# Altium PCB PCB_Menu-display_2021-06-02.pcbdoc
Units mm, origin at the board's own origin, x right, y up, seen from the top; angles counter-clockwise.
Board outline 86.99 x 83.19 mm, 2 copper layers (Top Layer, Bottom Layer); 16 components, 10 nets, 73 pads, 18 vias.
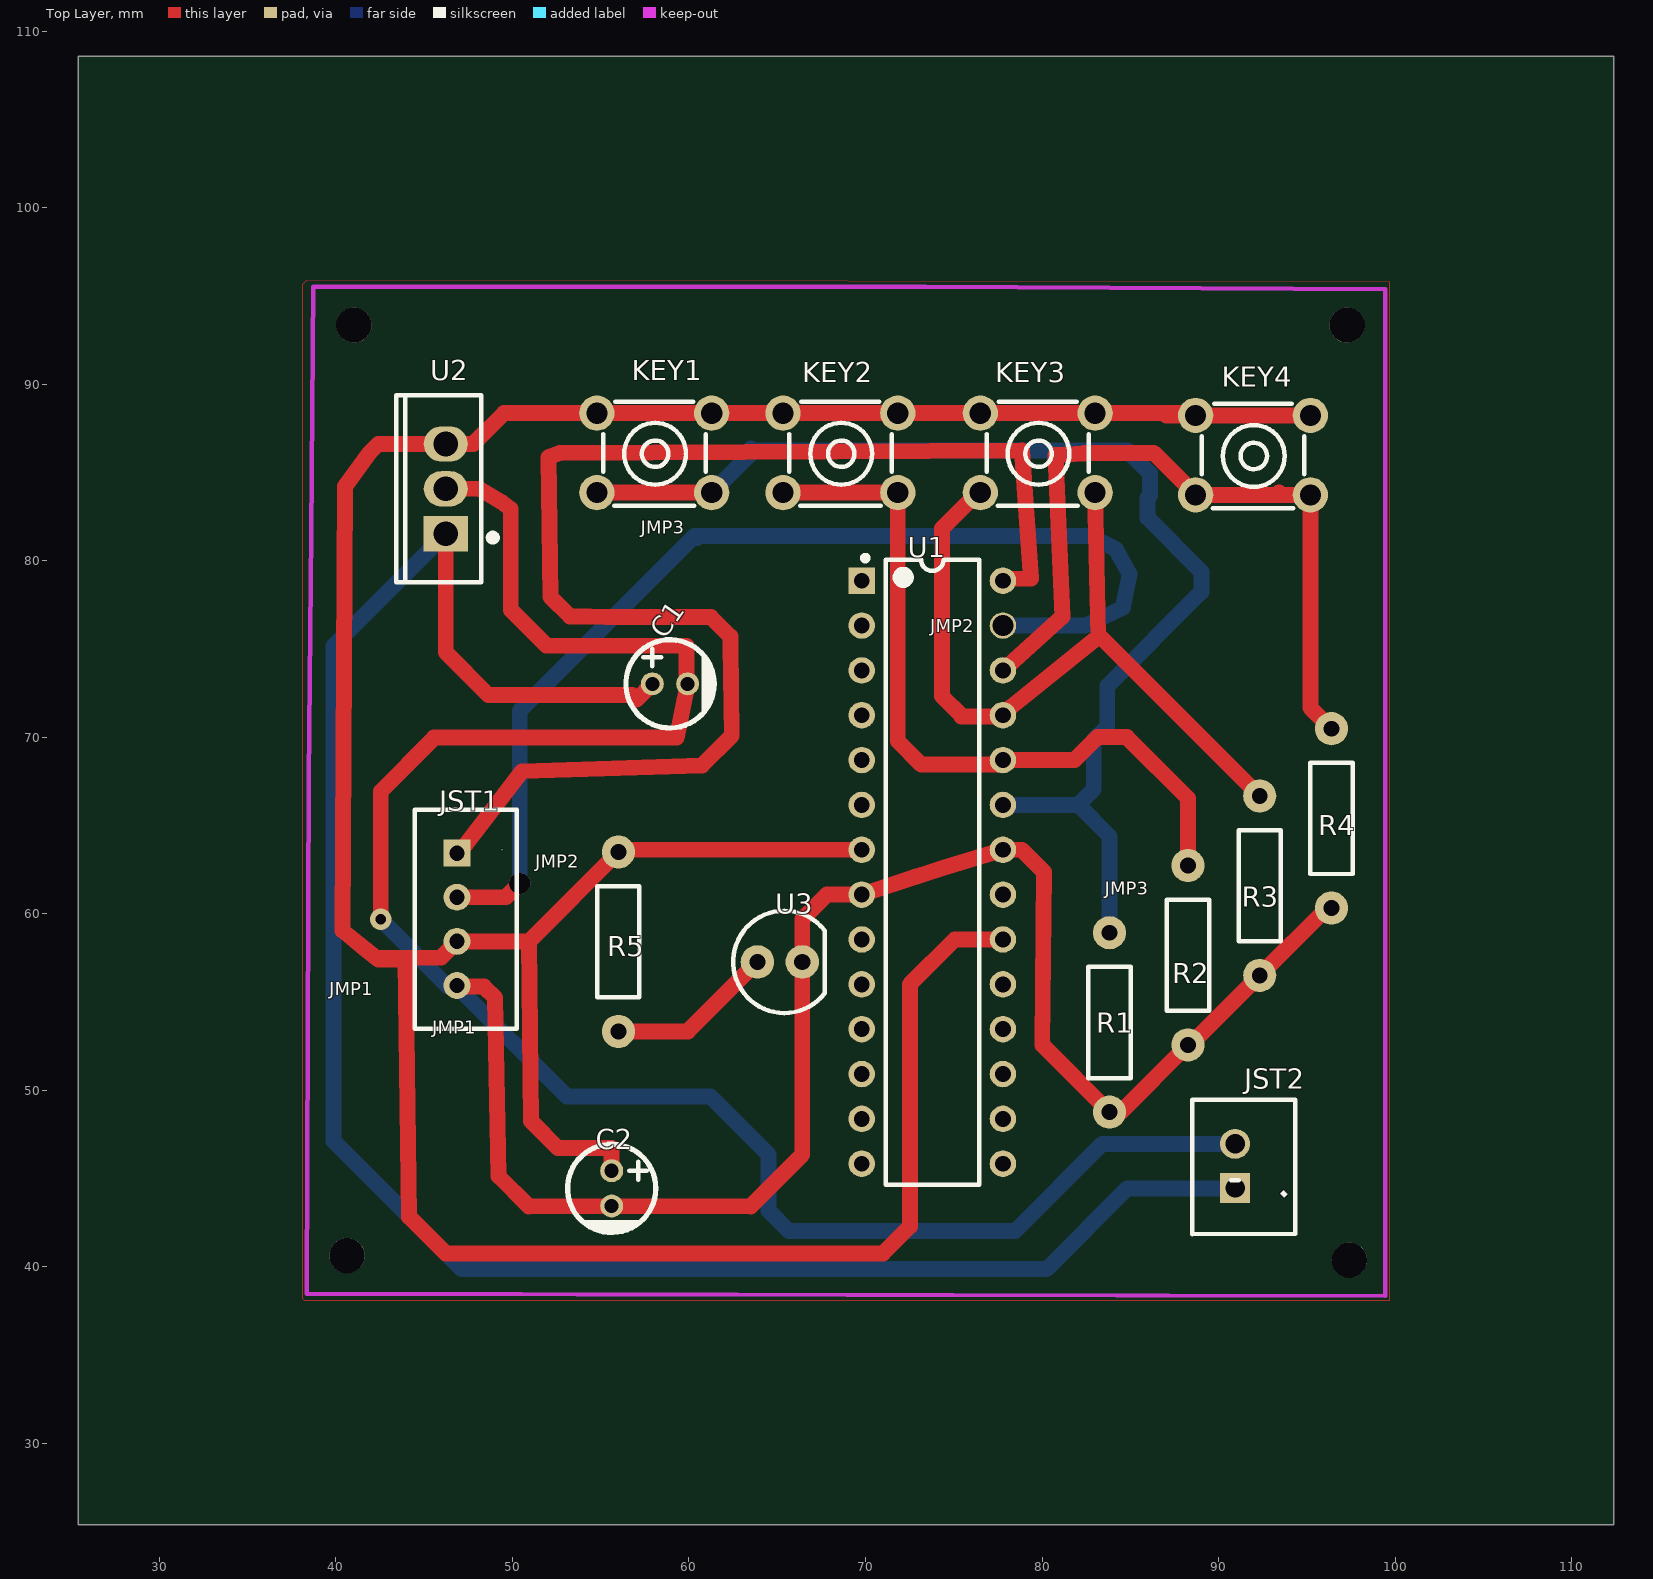
[diagram p0: Top Layer view]
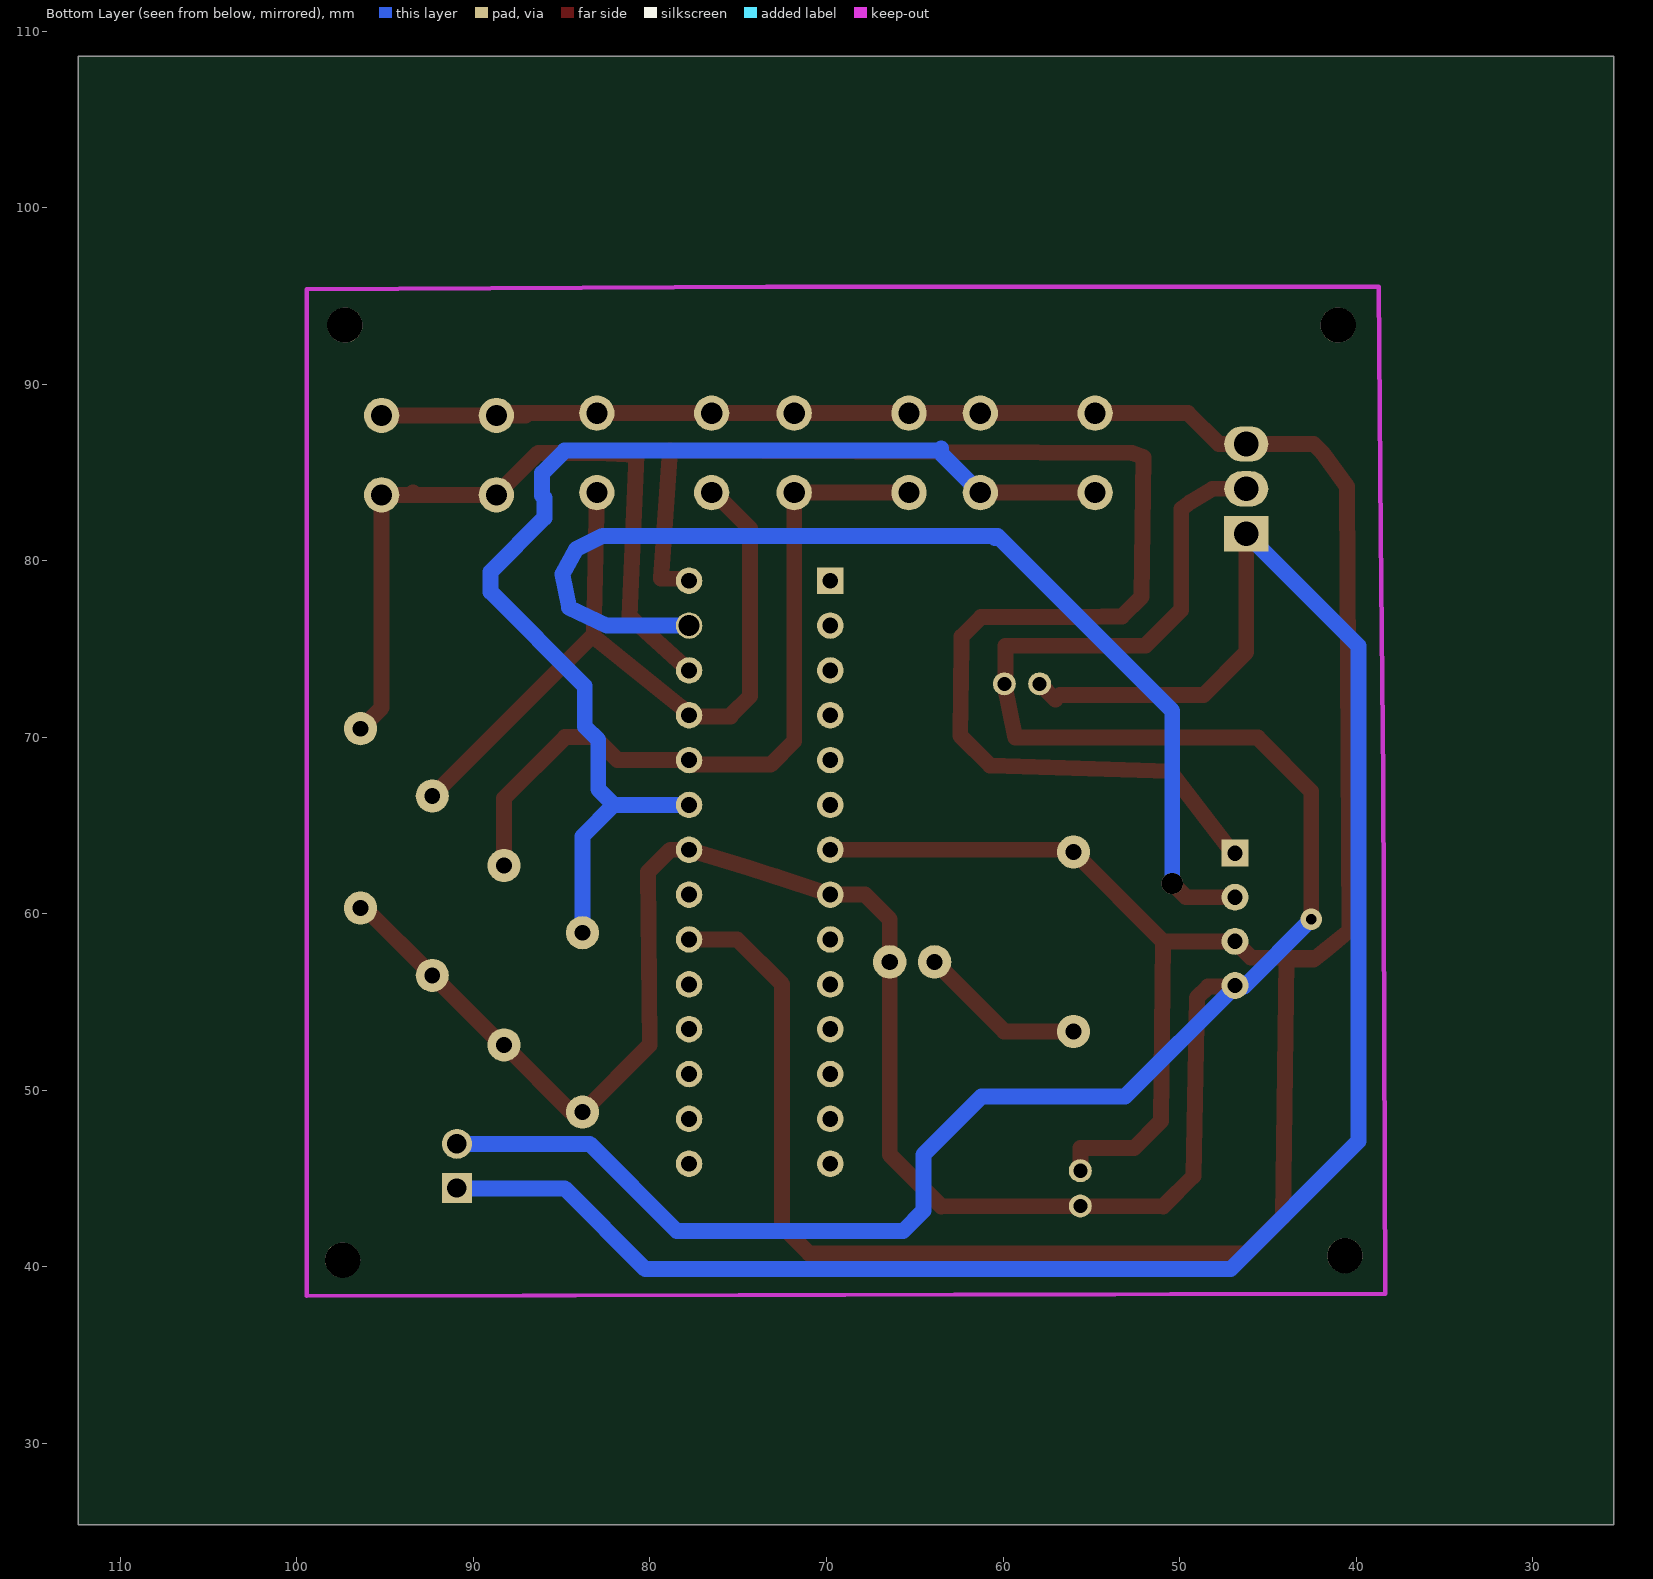
[diagram p1: Bottom Layer view, seen from below]

## Layer stack, top to bottom
Top Layer: signal copper (thickness not stored)
Dielectric: dielectric 0.32, FR-4, Dk 4.8
Bottom Layer: signal copper (thickness not stored)

## Board outline
112.395,25.4 25.4,25.4 25.4,108.585 112.395,108.585

## Components (designator, comment, footprint, x,y, rotation, side; value= is the part's Value field where it differs from the comment)
C1 "330nF" CAP-TH_BD5.0-P2.00-D0.8-FD 58.928,73.025 r0 top
C2 "100nF" CAP-TH_BD5.0-P2.00-D0.8-FD 55.626,44.45 r270 top
JST1 "LCD" JST_XH_4_PIN_TOP_ENTRY 46.863,59.69 r0 top
JST2 "POWER" CONN-TH_XHB-2A 90.932,45.72 r270 top
KEY1 "Push_Button" KEY-TH_4P-L6.0-W6.0-P4.50 58.039,86.106 r180 top
KEY2 "Push_Button" KEY-TH_4P-L6.0-W6.0-P4.50 68.58,86.106 r180 top
KEY3 "Push_Button" KEY-TH_4P-L6.0-W6.0-P4.50 79.756,86.106 r180 top
KEY4 "Push_Button" KEY-TH_4P-L6.0-W6.0-P4.50 91.948,85.979 r180 top
R1 "4.7K" AXIAL-0.4 83.82,53.848 r90 top
R2 "4.7K" AXIAL-0.4 88.265,57.658 r90 top
R3 "4.7K" AXIAL-0.4 92.329,61.595 r90 top
R4 "4.7K" AXIAL-0.4 96.393,65.405 r90 top
R5 "330Ω" AXIAL-0.4 56.007,58.42 r270 top
U1 "ATMEGA _328P-PU" DIP-28_L34.6-W7.3-P2.54-LS10.2-BL 73.787,62.357 r270 top
U2 "7805_Regulator" TO-220-3_L10.0-W4.5-P2.54-L 46.228,84.074 r90 top
U3 "LED" "5MM LED" 63.881,57.277 r0 top

## Footprints (in the part's own frame and the unit in brackets; to place one, negate y for a bottom-side part, rotate by r counter-clockwise, add the part's x,y. Pads: shape width x height; smd on the part's side, far side on the other; paste and mask are expansions set on the pad)
"5MM LED" [mm]
  round 1.9 hole 0.914: 1(0,0) 2(2.54,0)
  silkscreen extent -1.37,-2.9 3.81,2.9
AXIAL-0.4 [mil]
  round 74 hole 35.4: 1(-200,0) 2(200,0)
  silkscreen extent -124,-47 124,47
CAP-TH_BD5.0-P2.00-D0.8-FD [mm]
  round 1.3 hole 0.8: 1(-1,0) 2(1,0)
  silkscreen extent -2.5,-2.5 2.5,2.5
CONN-TH_XHB-2A [mm]
  rect 1.7x1.7 hole 1.1: 1(1.251,0)
  round 1.7 hole 1.1: 2(-1.251,0)
  silkscreen extent -3.75,-2.42 3.86,3.4
DIP-28_L34.6-W7.3-P2.54-LS10.2-BL [mm]
  rect 1.5x1.5 hole 0.9: 1(-16.51,-4)
  round 1.5 hole 0.9: 2(-13.97,-4) 3(-11.43,-4) 4(-8.89,-4) 5(-6.35,-4) 6(-3.81,-4) 7(-1.27,-4) 8(1.27,-4) 9(3.81,-4) 10(6.35,-4) 11(8.89,-4) 12(11.43,-4) 13(13.97,-4) 14(16.51,-4) 15(16.51,4) 16(13.97,4) 17(11.43,4) 18(8.89,4) 19(6.35,4) 20(3.81,4) 21(1.27,4) 22(-1.27,4) 23(-3.81,4) 24(-6.35,4) 25(-8.89,4) 26(-11.43,4) 27(-13.97,4) 28(-16.51,4)
  silkscreen extent -17.94,-3.95 17.7,2.65
JST_XH_4_PIN_TOP_ENTRY [mil]
  rect 60x60 hole 34.25: 1(0,147.6)
  round 60 hole 34.25: 2(0,49.21) 3(0,-49.21) 4(0,-147.64)
  silkscreen extent -94,-244 134,244
KEY-TH_4P-L6.0-W6.0-P4.50 [mm]
  round 2 hole 1.2: 1(-3.25,-2.25) 2(3.25,-2.25) 3(3.25,2.25) 4(-3.25,2.25)
  silkscreen extent -2.9,-2.9 2.9,3
TO-220-3_L10.0-W4.5-P2.54-L [mm]
  rect 2x2.5 hole 1.4: 1(-2.54,0)
  oval 2x2.5 hole 1.4: 2(0,0) 3(2.54,0)
  silkscreen extent -5.3,-2.86 5.3,2.8

## Free pads (board coordinates)
  round 2 hole 2: 1(40.64,40.64) 1(41.021,93.345) 1(97.282,93.345) 1(97.409,40.386)

## Via types
v1: diameter 1.2, hole 0.6, Top Layer to Bottom Layer, 7 vias
v2: diameter 1.2, hole 0.305, Top Layer to Bottom Layer, 5 vias
v3: diameter 1.2, hole 0.61, Top Layer to Bottom Layer, 3 vias
v4: diameter 1.2, hole 1.2, Top Layer to Bottom Layer, 2 vias
v5: diameter 0.61, hole 0.305, Top Layer to Bottom Layer, 1 vias

## Nets (pads, with @x,y where several pads share a name; then routed paths per layer and width w, separated by ;. In a path a pad name is that pad's centre, name@x,y a point inside that pad or via, vN(x,y) a via of type N, cw(c..) or ccw(c..) an arc to the next point about the centre after c; other vN are vias at no path point)
+5V: C2.1 JST1.3 KEY1.1 KEY1.2 KEY2.1 KEY2.2 KEY3.1 KEY3.2 KEY4.1 KEY4.2 R5.1 U1.7 U1.20 U2.3 | length 202.5
  Top Layer w0.9: 42.57,57.511 45.954,57.511 JST1.3@46.99,58.547 ; 44.196,42.799 44.158,42.837 ; C2.1 55.626,46.736 52.578,46.736 51.126,48.188 51.054,48.26 50.947,58.44 ; KEY2.2 KEY1.1 KEY1.2 49.53,88.356 47.788,86.614 U2.3 42.418,86.614 41.91,86.106 40.513,84.201 40.386,59.055 41.783,57.912 42.418,57.404 43.942,57.404 44.158,42.837 ; KEY2.2@65.965,88.483 66.092,88.356 KEY2.1 KEY3.2 ; U1.7 56.134,63.627 R5.1 50.947,58.44 ; 72.517,55.936 72.517,56.007 ; KEY3.2@76.506,88.61 76.76,88.356 KEY3.1 88.571,88.356 KEY4.2 ; U1.20 75.057,58.547 72.517,56.007 ; 86.92,88.356 87.047,88.229 KEY4.1 ; 44.158,42.837 46.228,40.767 70.993,40.767 72.517,42.291 72.517,42.799 72.517,56.007 ; 50.947,58.44 JST1.3 50.947,58.44
BTN1: KEY1.3 KEY1.4 R1.2 U1.23 | length 68.3
  Top Layer w0.9: KEY1.3 v3(61.289,83.856)
  Bottom Layer w0.9: v3(61.289,83.856) 63.5,86.067 63.5,86.36 63.627,86.233 84.836,86.233 86.106,84.963 86.106,83.693 85.979,83.566 85.979,82.423 89.027,79.375 89.027,78.232 83.693,72.898 83.693,70.612 82.931,69.85 82.931,67.056 82.042,66.167 ; U1.23 82.042,66.167 ; v3(83.82,58.928) 83.82,64.389 82.042,66.167
BTN2: KEY2.3 KEY2.4 R2.2 U1.24 | length 43.4
  Top Layer w0.9: KEY2.3 KEY2.4 ; KEY2.4@71.829,83.856 71.829,69.787 73.165,68.453 77.534,68.453 U1.24 81.831,68.707 83.134,70.01 84.803,70.01 88.265,66.548 R2.2
BTN3: KEY3.3 KEY3.4 R3.2 U1.25 | length 43.9
  Top Layer w0.9: KEY3.3@76.284,83.775 74.327,81.817 74.327,72.336 75.423,71.24 75.423,71.165 U1.25@77.565,71.165 ; U1.25 78.295,71.755 83.185,75.692 KEY3.4@83.006,83.856 ; 83.312,75.692 R3.2
BTN4: KEY4.3 KEY4.4 R4.2 U1.26 | length 43.1
  Top Layer w0.9: U1.26 81.153,76.835 80.772,85.979 82.389,86.068 82.389,86.106 86.321,86.106 KEY4.3 93.293,83.729 ; 93.42,83.856 93.293,83.729 ; R4.2 95.198,71.68 KEY4.4 93.293,83.729
GND: C1.2 C2.2 JST1.4 JST2.2 R1.1 R2.1 R3.1 R4.1 U1.8 U1.22 U2.2 U3.2 | length 206.9
  Top Layer w0.9: v1(42.545,59.69) 42.545,66.929 45.556,69.94 45.556,69.977 ; 45.593,69.977 59.182,69.977 59.309,69.977 C1.2 ; U2.2 48.133,84.074 49.403,83.312 49.911,82.931 49.911,77.216 ; v1(46.863,55.88) 48.387,55.88 49.022,55.245 49.212,45.148 ; 49.276,45.085 49.212,45.148 ; 49.911,77.213 51.94,75.184 59.868,75.184 59.868,73.085 C1.2 ; 72.847,62.103 U1.8 ; 80.121,62.194 80.121,62.358 ; R4.1 96.139,60.325 R3.1 88.392,52.578 R2.1 84.455,48.768 R1.1 80.01,52.578 80.121,62.358 ; 49.212,45.148 50.927,43.434 C2.2 63.5,43.434 66.421,46.355 U3.2 66.421,59.69 67.818,61.087 U1.8 ; U1.8 74.422,62.611 U1.22 78.852,63.627 80.121,62.358
  Bottom Layer w0.9: v1(42.545,59.69) 46.355,55.88 v1(46.863,55.88) 53.086,49.657 61.214,49.657 64.516,46.355 64.516,43.18 65.659,42.037 78.486,42.037 83.42,46.971 v1(90.932,46.971)
  other v1: 46.863,55.88 42.545,59.69
  other v2: 46.863,55.88 42.545,59.69 42.545,59.69 42.545,59.69 42.545,59.69
  other v3: 42.545,59.69
  other v5: 46.863,55.94
SCL: JST1.1 U1.28 | length 78.4
  Top Layer w0.9: JST1.1@47.084,63.551 50.546,68.072 60.742,68.407 62.428,70.094 62.349,75.217 62.349,75.705 61.244,76.81 55.339,76.81 54.376,76.848 53.264,76.848 52.151,77.96 52.05,85.862 52.705,86.106 78.867,86.233 79.375,78.994 U1.28@78.008,78.969
SDA: JST1.2 U1.27 | length 62.5
  Top Layer w0.9: JST1.2 49.637,60.94 v4(50.419,61.722)
  Bottom Layer w0.9: v4(50.419,61.722) 50.419,71.501 60.325,81.407 ; 60.452,81.28 60.325,81.407 ; v4(77.787,76.327) 82.423,76.327 84.582,77.343 84.963,79.248 84.201,80.645 82.677,81.407 60.325,81.407
U3_1: R5.2 U3.1 | length 9.5
  Top Layer w0.9: R5.2 59.944,53.34 U3.1
VCC: C1.1 JST2.1 U2.1 | length 112.9
  Top Layer w0.9: v1(46.228,81.534) 46.228,74.813 48.641,72.39 56.784,72.39 57.038,72.136 C1.1
  Bottom Layer w0.9: v1(46.228,81.534) 39.878,75.184 39.878,47.117 47.117,39.878 80.264,39.878 84.836,44.45 v1(90.932,44.45)
pads on no net: U1.1 U1.2 U1.3 U1.4 U1.5 U1.6 U1.9 U1.10 U1.11 U1.12 U1.13 U1.14 U1.15 U1.16 U1.17 U1.18 U1.19 U1.21

## Polygon pours and split planes (outlines as drawn)
GND on Top Layer (solid): 38.354,95.885 38.1,95.631 38.1,38.227 38.227,38.1 99.695,38.1 99.695,95.758

## Silkscreen, mask and mechanical layers (free items; w line width, h text height)
Top Overlay:
  text "JMP3" at 57.277,81.54 h0.75
  text "JMP2" at 73.66,75.952 h0.75
  text "JMP2" at 51.308,62.617 h0.75
  text "JMP3" at 83.566,61.093 h0.75
  text "JMP1" at 39.624,55.378 h0.75
  text "JMP1" at 45.466,53.219 h0.75